# EAGLE board 4 (EAGLE 9.7.0)

Size 63.34 x 58.66 mm. Coordinates in mm from the lower left corner, seen from the top.
Outline: 0,0 63.34,0 63.34,58.66 0,58.66 0,0
Copper layers (1*16): Top 0.035mm / dielectric 1.5mm / Bottom 0.035mm
Design rules "default": minimum track width 6mil, minimum drill 0.35mm, track to track 6mil, track to pad 6mil, pad to pad 6mil, via to via 6mil, smd to smd 6mil, copper to edge 40mil, drill to drill 6mil, minimum pad ring 10mil, minimum via ring 8mil, stop-mask expansion 4mil, vias tented up to drill 0mil, thermal gap 10mil

## Footprints (pad centres in the part's own frame; a part is rotated, then mirrored left to right if it is on the bottom)
BATTERY-GENERIC = drill 1.118 pad 3.15 octagon: + 2.54,0; - -2.54,0
LEDRD254W60D565H860B_G = drill 0.981 pad 1.581: 1 -1.27,0; 2 1.27,0
DIP762W53P254L1969H508Q14B = drill 0.743 pad 1.343: 1 -3.81,7.62; 2 -3.81,5.08; 3 -3.81,2.54; 4 -3.81,0; 5 -3.81,-2.54; 6 -3.81,-5.08; 7 -3.81,-7.62; 8 3.81,-7.62; 9 3.81,-5.08; 10 3.81,-2.54; 11 3.81,0; 12 3.81,2.54; 13 3.81,5.08; 14 3.81,7.62

## Placement (x,y rotation side)
BAT1  1.5V  [BATTERY-GENERIC]  8.26,8.26 0 top
D1  GREEN  [LEDRD254W60D565H860B_G]  57.28,50.75 180 top
U1  74HC08_PDIP  [DIP762W53P254L1969H508Q14B]  20.45,44.4 90 top
U2  74HC32_PDIP  [DIP762W53P254L1969H508Q14B]  43.31,44.4 90 top

## Library data of the parts
BAT1 U1 U2 = Tinkercad
D1 = Tinkercad; CATEGORY: Opto-Electronic; SUB-CATEGORY: LED; VALUE: LED_GREEN

## Nets
BAT1+: BAT1.+ U1.1 U1.2 U1.7 U2.14
BAT1-: BAT1.- D1.2 U2.2 U2.7
U1_3Y: U1.8 U2.1
U2_1Y: D1.1 U2.3

## Tracks (layer width: path | path; a pad name or v marks a point on that pad's centre or on a via)
BAT1+  (4 unrouted)
BAT1-  (3 unrouted)
U1_3Y  (1 unrouted)
U2_1Y  (1 unrouted)